# Altium PCB RFID PIC.PcbDoc
Units mm, origin at the board's own origin, x right, y up, seen from the top; angles counter-clockwise.
Board outline 126.98 x 89.15 mm, 2 copper layers (Top Layer, Bottom Layer); 27 components, 30 nets, 135 pads, 30 vias.
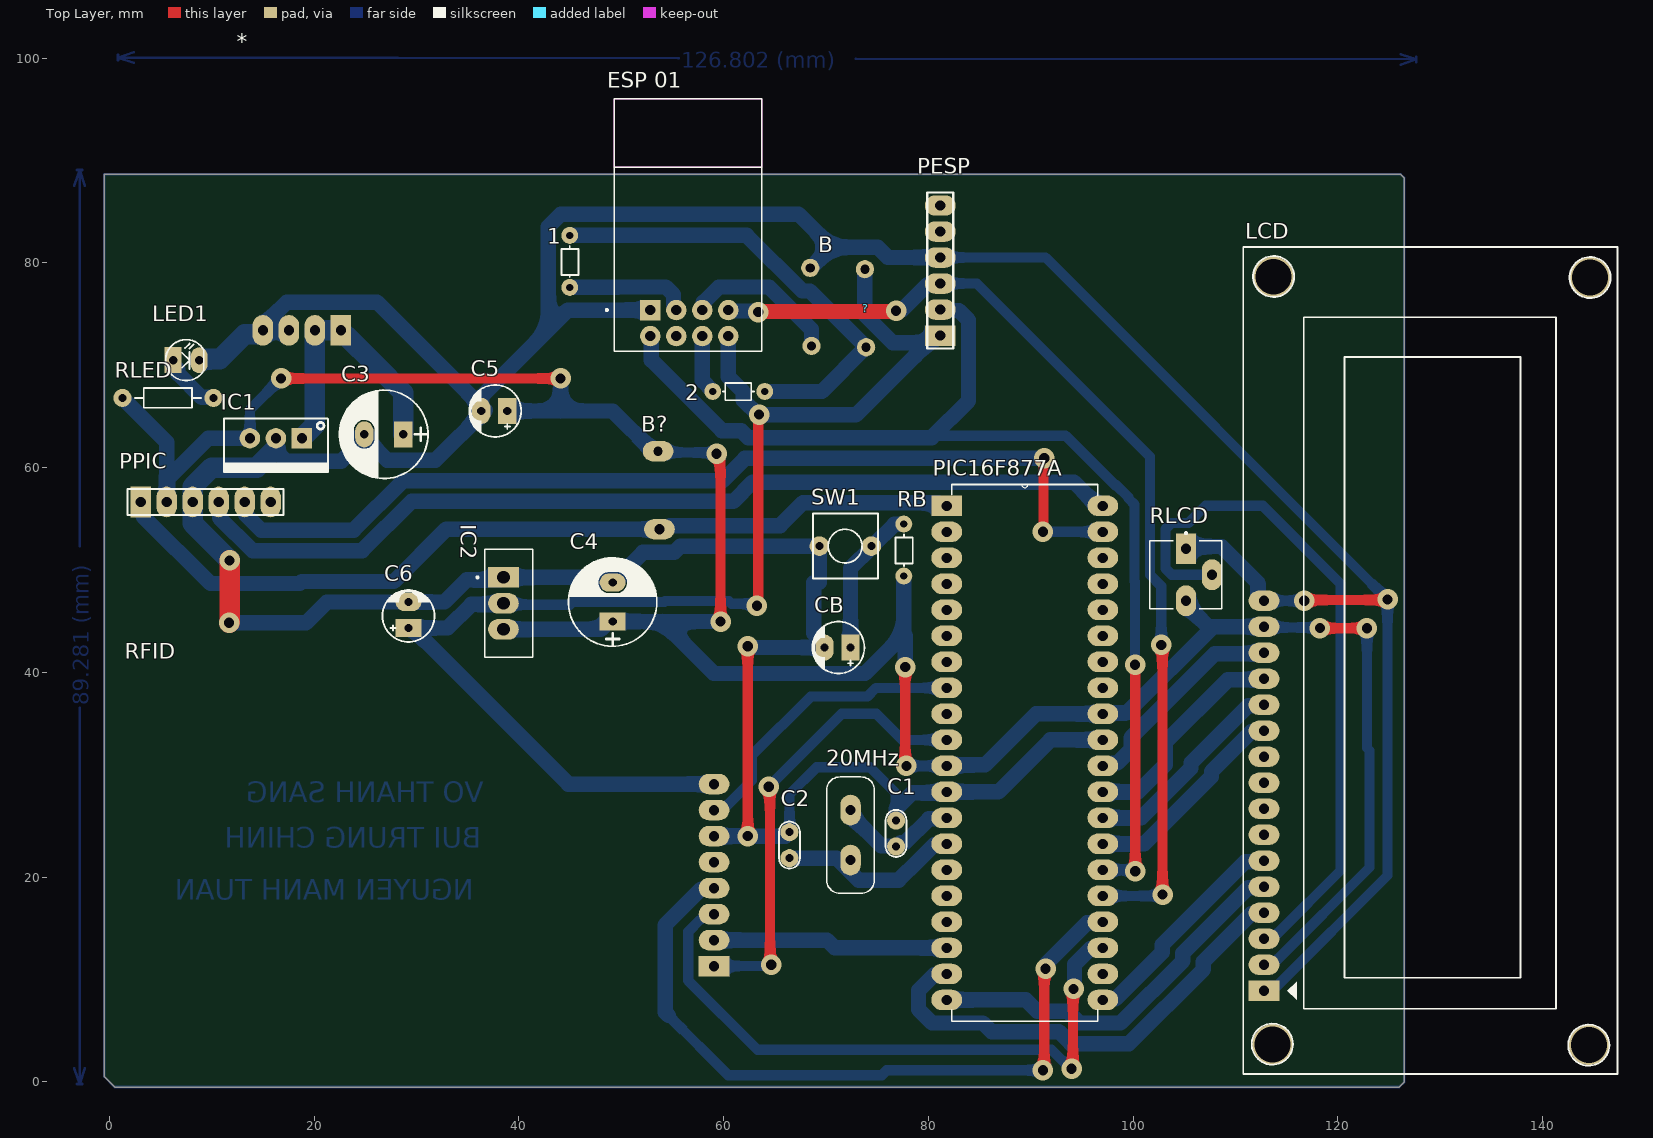
[diagram p0: Top Layer view]
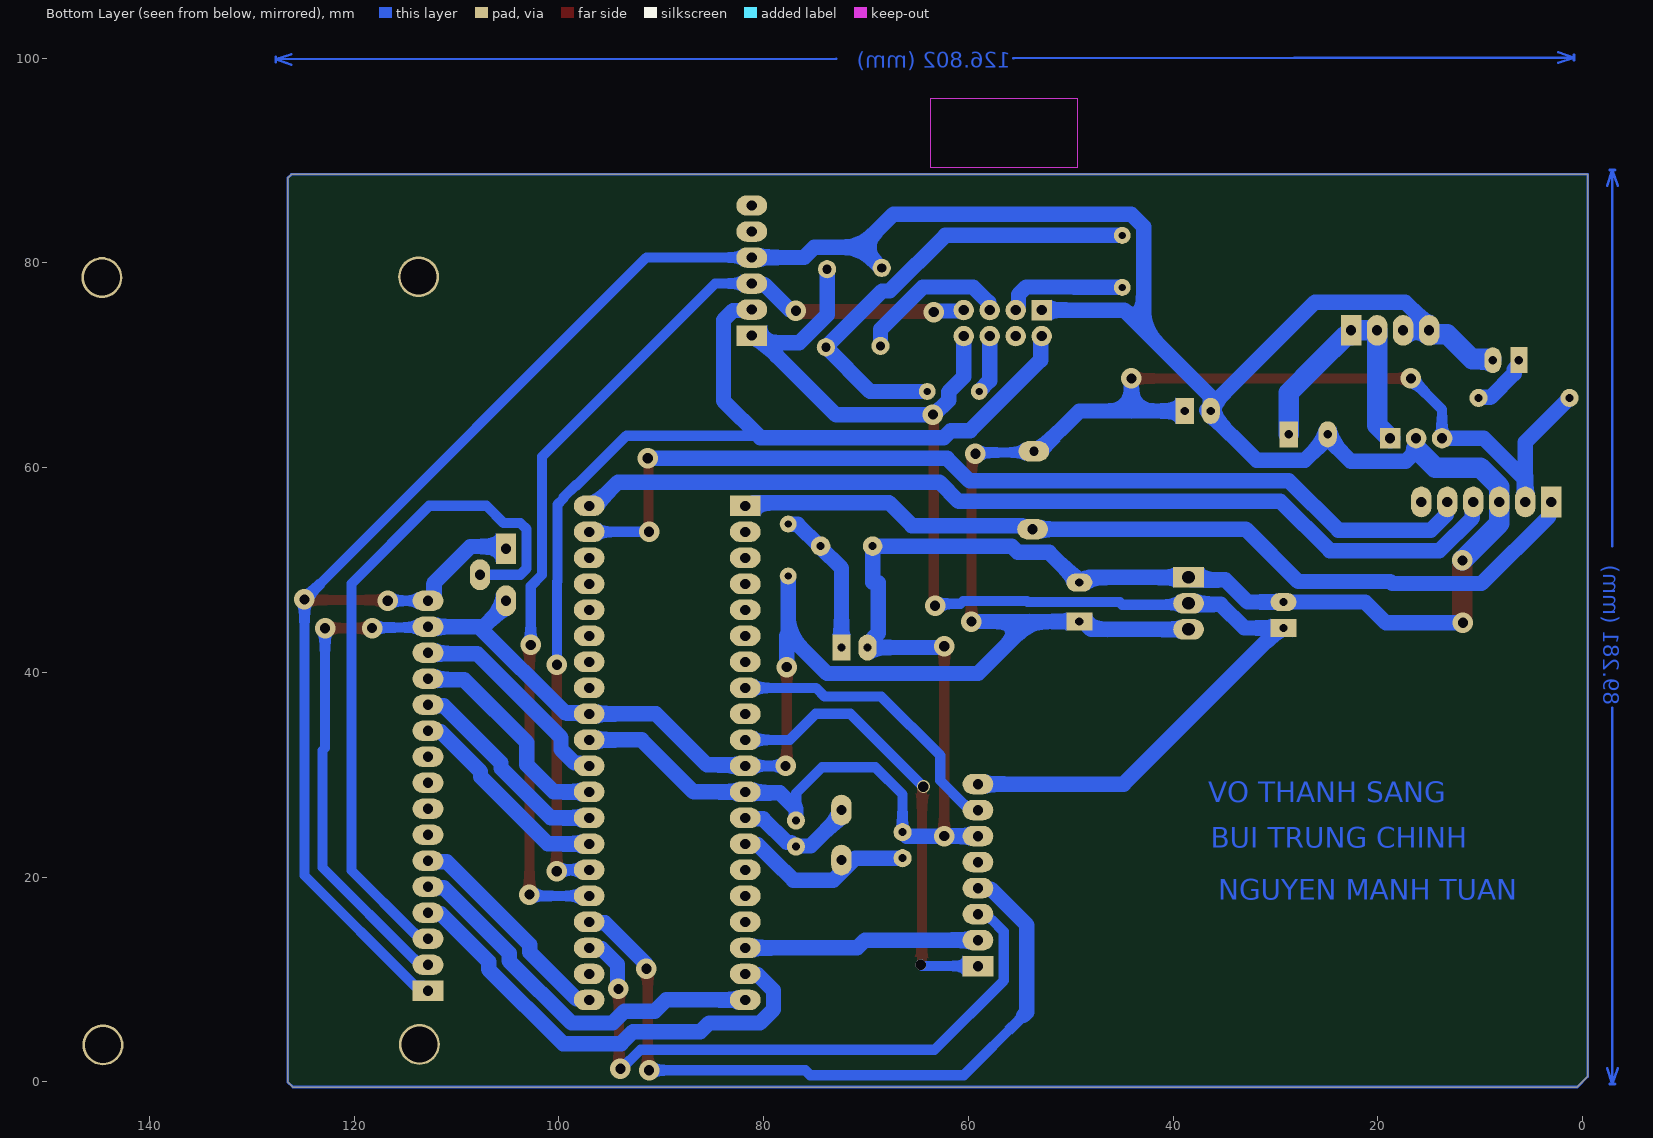
[diagram p1: Bottom Layer view, seen from below]
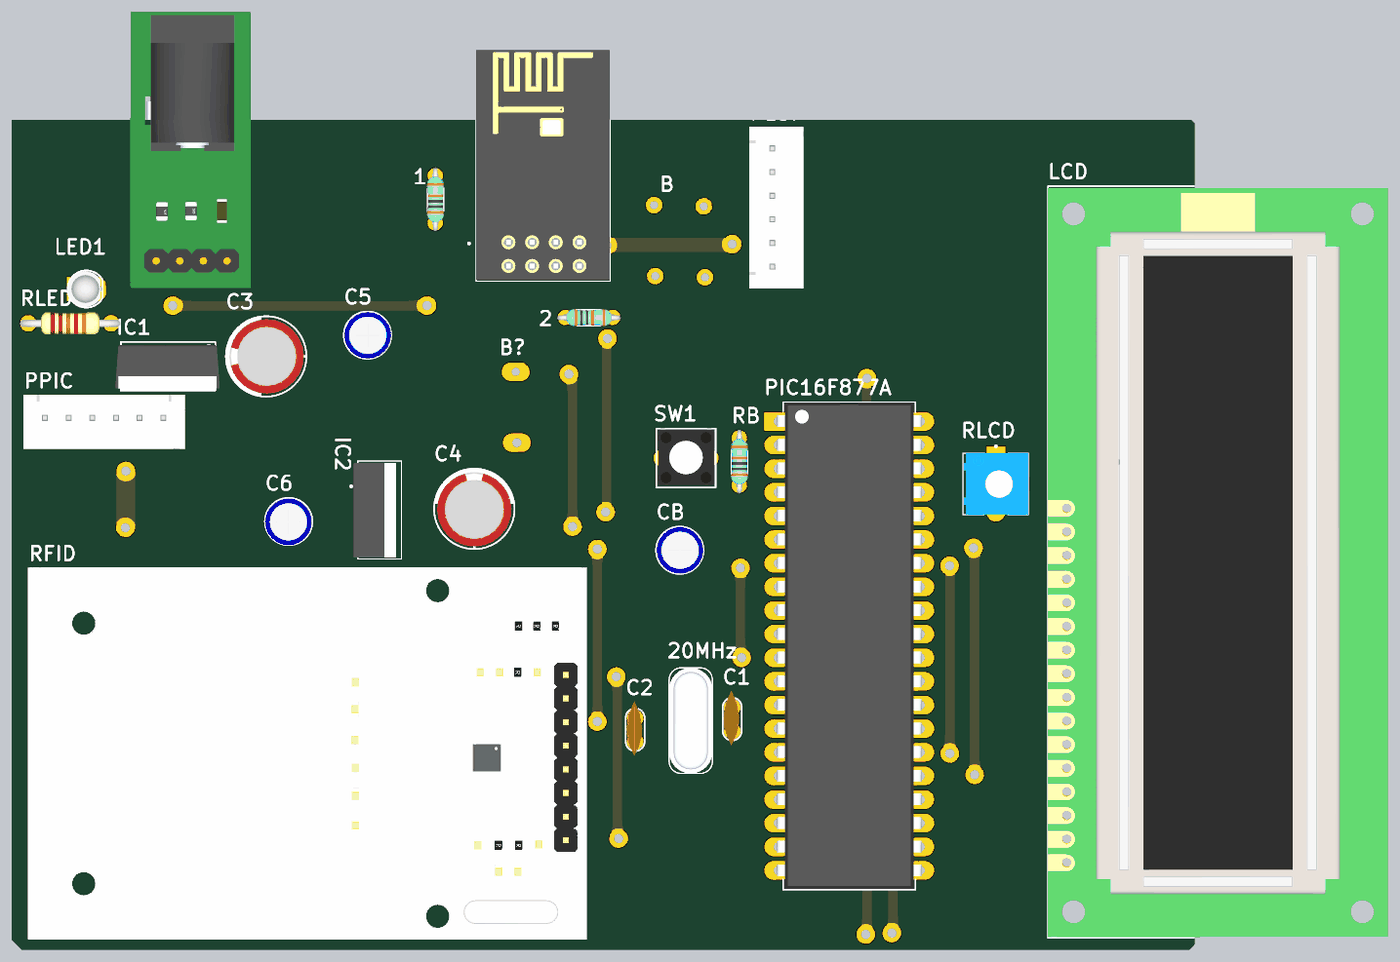
[diagram p2: 3D render of the assembled board from above, using the file's embedded part models]

## Layer stack, top to bottom
Top Solder: solder mask 0.0102, Solder Resist, Dk 3.5
Top Layer: signal copper 0.0356
Dielectric 1: dielectric 0.32, FR-4, Dk 4.8
Bottom Layer: signal copper 0.0356
Bottom Solder: solder mask 0.0102, Solder Resist, Dk 3.5

## Board outline
0.508,-0.508 -0.508,0.508 -0.508,88.646 126.111,88.646 126.476,88.281 126.476,-0.016 125.984,-0.508

## Design rules (kind name [scope] priority, off if disabled: settings)
Clearance [All] p1: gap=0.508 ignorepadtopadclearanceinfootprint=FALSE
PolygonConnect [All] p1: connectstyle=Relief reliefconductorwidth=0.254 reliefentries=4 polygonreliefangle="90 Angle" airgapwidth=0.254
RoutingVias [All] p1: holewidth=0.711 width=1.27 viastyle="Through Hole" minholewidth=0.711 minwidth=1.27 maxholewidth=0.711 maxwidth=1.27
SolderMaskExpansion [All] p1: expansion=0.102 istentingtop=FALSE
Width [All] p1: maxlimit=2 minlimit=1 preferedwidth=1.5 minimp=50.000000 maximp=50.000000 favimp=50.000000
30 further rules are at their usual default settings.

## Components (designator, comment, footprint, x,y, rotation, side; value= is the part's Value field where it differs from the comment)
1 "10k" R1/8W 44.958,80.137 r270 top value="R1/4W - 1K"
2 "10k" R1/8W 61.468,67.437 r180 top value="R1/4W - 1K"
20MHz "quartz" XTAL_ECS200S4X 72.39,24.103 r90 top
* "modul jack 5mm" ModulDC 22.606,73.406 r270 top
? "BUTTON BIT" PCBComponent_1#1 73.914,75.946 r0 top
B "BUTTON BIT" PCBComponent_1#1 68.58,76.073 r0 top
B? "BUTTON BIT" PCBComponent_1#2 53.594,57.404 r180 top
C1 "22pF" CN1 76.835,22.987 r90 top value=100pF
C2 "22pF" CN1 66.421,21.844 r90 top value=100pF
C3 "10uF/25V" CP1.5/3.4 28.702,63.246 r180 top value=100uF/35V/50V
C4 "1uF/10V" CP1.5/3.4 49.149,44.958 r90 top value=100uF/35V/50V
C5 "10uF" CP1/2 38.862,65.532 r180 top value=10uF/50V
C6 "10uF" CP1/2 29.21,44.323 r90 top value=10uF/50V
CB "10uF" CP1/2 72.39,42.418 r180 top value=10uF/50V
"ESP 01" "esp8266" XCVR_ESP8266-01/ESP-01 56.642,83.693 r0 top
IC1 "LM7805" QTO-220 18.796,62.865 r180 top
IC2 "LM1117" TO254P1054X470X1955-3 38.481,46.736 r270 top
LCD "LCD16x2A" LCD16X2 112.776,8.89 r90 top
LED1 "LED" LED-3 6.223,70.485 r0 top value="LED 3 ly Single Colour"
PESP "Header 6" HDR1X6 81.153,72.898 r90 top
PIC16F877A "16F877a" DIP254P1524X483-40 97.028,8.001 r0 top
PPIC "Header 6" HDR1X6 3.048,56.642 r0 top
RB "10k" R1/8W 77.597,51.943 r270 top value="R1/4W - 1K"
RFID "RC522" PCBComponent_1#3 59.055,11.303 r180 top
RLCD "10K" TRIM_3362P-1-203 105.156,49.53 r270 top value="R1/4W - 1K"
RLED "1k" R1/4W 10.16,66.802 r180 top value="R1/4W - 1K"
SW1 "SW" SW2 69.342,52.324 r0 top value="SW chip 2 pin"

## Footprints (in the part's own frame and the unit in brackets; to place one, negate y for a bottom-side part, rotate by r counter-clockwise, add the part's x,y. Pads: shape width x height; smd on the part's side, far side on the other; paste and mask are expansions set on the pad)
CN1 [mil]
  round 70 hole 31: 1(0,0) 2(100,0)
  silkscreen extent -40,-40 141,40, body extent -60,-30 170,37, height 265
CP1.5/3.4 [mil] "Tu hoa 220->470uF,16V, 470uF/16V,25V"
  rect 70x100 hole 32: 1(0,0)
  oval 70x100 hole 32: 2(150,0)
  silkscreen extent -95,-170 245,170, body extent -85,-157 230,157, height 446
CP1/2 [mil] "Tu hoa < 22uF/16>50V"
  rect 70x100 hole 32: 1(0,0)
  oval 70x100 hole 32: 2(100,0)
  silkscreen extent -53,-100 147,100, body extent -54,-99 144,100, height 296
DIP254P1524X483-40 [mm]
  rect 3x2 hole 0.991: 1(-15.24,48.26)
  oval 3x2 hole 0.991: 2(-15.24,45.72) 3(-15.24,43.18) 4(-15.24,40.64) 5(-15.24,38.1) 6(-15.24,35.56) 7(-15.24,33.02) 8(-15.24,30.48) 9(-15.24,27.94) 10(-15.24,25.4) 11(-15.24,22.86) 12(-15.24,20.32) 13(-15.24,17.78) 14(-15.24,15.24) 15(-15.24,12.7) 16(-15.24,10.16) 17(-15.24,7.62) 18(-15.24,5.08) 19(-15.24,2.54) 20(-15.24,0) 21(0,0) 22(0,2.54) 23(0,5.08) 24(0,7.62) 25(0,10.16) 26(0,12.7) 27(0,15.24) 28(0,17.78) 29(0,20.32) 30(0,22.86) 31(0,25.4) 32(0,27.94) 33(0,30.48) 34(0,33.02) 35(0,35.56) 36(0,38.1) 37(0,40.64) 38(0,43.18) 39(0,45.72) 40(0,48.26)
  silkscreen extent -14.73,-2.08 -0.51,50.34, body extent -15.39,-1.98 0.15,50.29, height 4.83
HDR1X6 [mm] "Connector; Header; 6 Position"
  rect 2x3 hole 1: 1(0,0)
  oval 2x3 hole 1: 2(2.54,0) 3(5.08,0) 4(7.62,0) 5(10.16,0) 6(12.7,0)
  silkscreen extent -1.27,-1.27 13.97,1.27, body extent -2.34,-3.35 15.04,2.49, height 7.21
LCD16X2 [mm] "LCD dipslay 16x2, 16 pin"
  rect 2x3 hole 1: 1(0,0)
  oval 2x3 hole 1: 2(2.54,0) 3(5.08,0) 4(7.62,0) 5(10.16,0) 6(12.7,0) 7(15.24,0) 8(17.78,0) 9(20.32,0) 10(22.86,0) 11(25.4,0) 12(27.94,0) 13(30.48,0) 14(33.02,0) 15(35.56,0) 16(38.1,0)
  round 4 hole 3.5: "Hole 0"(-5.283,-31.75) "Hole 0"(-5.232,-0.838) "Hole 0"(69.672,-31.852) "Hole 0"(69.748,-0.914)
  silkscreen extent -8.13,-34.54 72.64,2.03, body extent -8.08,-34.47 72.42,2.03, height 17.02
LED-3 [mil] "LED 2 PIN, 3ly Only colour"
  rect 65x100 hole 32: 1(0,0)
  oval 65x100 hole 32: 2(100,0)
  silkscreen extent -29,-78 118,79, body extent -29,-75 109,75, height 256
ModulDC [mm]
  rect 3x2 hole 1: 1(0,0)
  oval 3x2 hole 1: 1(0,-2.54) 2(0,-5.08) 2(0,-7.62)
  body extent -26.91,-10.41 2.78,2.54, height 11
PCBComponent_1#1 [mil]
  round 70 hole 35: 1(-5,135) 2(0,-165)
  body extent -80,-210 74,180, height 323
PCBComponent_1#2 [mil]
  oval 118.11x78.74 hole 39.37: 1(-5,135)
  oval 118.11x78.74 hole 35: 2(0,-165)
  body extent -80,-210 74,180, height 323
PCBComponent_1#3 [mil]
  rect 118.11x78.74 hole 40: 1(0,0)
  oval 118.11x78.74 hole 40: 2(0,-100) 3(0,-200) 4(0,-300) 5(0,-400) 6(0,-500) 7(0,-600) 8(0,-700)
  body extent -85,-1152 2277,422, height 588
QTO-220 [mm] "TO-220 - 1-2-3"
  rect 2x2 hole 0.991: 1(0,0)
  round 2 hole 0.991: 2(2.54,0) 3(5.08,0)
  silkscreen extent -2.54,-1.93 7.62,3.3, body extent -3.02,-1.63 8.19,3.06, height 22.98
R1/4W [mil] "R 1/4W, 2 Pin, 350mil"
  round 70 hole 31: 1(0,0) 2(350,0)
  silkscreen extent 48,-38 302,38, body extent -40,-47 386,47, height 111
R1/8W [mil] "R 1/8W, 2 pin, 300mil"
  round 65 hole 28: 1(-100,0) 2(100,0)
  silkscreen extent -60,-32 61,34, body extent -135,-35 135,37, height 86
SW2 [mil] "SW button 2pin, 250x 250 mil"
  round 75 hole 31: 1(0,0) 2(200,0)
  silkscreen extent -25,-125 225,125, body extent -18,-116 218,128, height 197
TO254P1054X470X1955-3 [mm]
  rect 2x3 hole 1.24: 1(-2.54,0)
  oval 2x3 hole 1.24: 2(0,0) 3(2.54,0)
  silkscreen extent -5.27,-2.64 5.27,2.86, body extent -5.08,-2.29 5.08,2.29, height 19.55
TRIM_3362P-1-203 [mm]
  rect 3x2 hole 1: 1(-2.54,0)
  oval 3x2 hole 1: 2(0,2.54) 3(2.54,0)
  silkscreen extent -4.16,-3.53 3.3,3.47, body extent -3.3,-3.49 3.3,3.49, height 4.88
XCVR_ESP8266-01/ESP-01 [mm]
  rect 2x2 hole 1: 1(-3.81,-8.31)
  round 2 hole 1: 2(-1.27,-8.31) 3(1.27,-8.31) 4(3.81,-8.31) 5(-3.81,-10.85) 6(-1.27,-10.85) 7(1.27,-10.85) 8(3.81,-10.85)
  Keep-Out Layer region: 7.09,5.65 -7.31,5.65 -7.31,12.35 7.09,12.35
  silkscreen extent -8.16,-12.35 7.09,12.35, body extent -7.33,-12.22 7.07,12.48, height 6.5
XTAL_ECS200S4X [mm]
  oval 3x2 hole 1: 1(-2.44,0) 2(2.44,0)
  silkscreen extent -5.68,-2.33 5.68,2.33, body extent -5.68,-2.32 5.68,2.32, height 3.5

## Part data
1 2 RB RLCD: library part RES, "Resistor 1/4W"
? B B?: library part DIP
C1 C2: library part CAP, "Cap np  1pF - 472pF"
C3 C4: library part CP3, "Cap 100uF/35V - 470uF/16V", Description 1="1000uF/6,3V - 470uF/16V - 330uF - 25V", Description 2="220uF/35V - 100uF/50V - 63V - 4,7uF/200V", Description 3="22uF => 33uF100V - 3,3uF => 4,7uF/250V", Description 4="2,2uF =>3,3uF/350 - 2,2uF/400V - 1uF/450V"
C5 C6 CB: library part CP0, "Cap P  0,1uF < 22uF , 16 - 50V", Description 1="10 => 220uF/6,3V/10V - 10uF => 100uF/16V", Description 2="0,1uF => 33uF/50V - 10uF => 22uF/63V", Description 3="0,47uF => 10uF/100V"
IC1: library part LM78xx, "On ap +, from + 5 to + 24VDC"
IC2: library part asm1117
LCD: library part LCD16x2, "LCD dipslay 16 char, 2 line"
LED1: "LED Single colour Green and Red"
PESP PPIC: "Header, 6-Pin", LatestRevisionDate=17-Jul-2002, LatestRevisionNote="Re-released for DXP Platform.", Publisher="Altium Limited"
RLED: library part R, "Resistor 1/4W"
SW1: library part SW2, "Switch button 2 pin"

## Via types
v1: diameter 2, hole 1, Top Layer to Bottom Layer, 20 vias
v2: diameter 2/2 (per signal layer), hole 1, Top Layer to Bottom Layer, 8 vias
v3: diameter 2/1.27 (per signal layer), hole 1, Top Layer to Bottom Layer, 1 vias
v4: diameter 2/1 (per signal layer), hole 1, Top Layer to Bottom Layer, 1 vias

## Nets (pads, with @x,y where several pads share a name; then routed paths per layer and width w, separated by ;. In a path a pad name is that pad's centre, name@x,y a point inside that pad or via, vN(x,y) a via of type N, cw(c..) or ccw(c..) an arc to the next point about the centre after c; other vN are vias at no path point)
2: B?.2 C4.1 C5.1 IC1.3 IC2.3 LCD.2 LCD.15 PIC16F877A.11 PIC16F877A.32 PPIC.2 RB.2 RLCD.3 RLED.2 | length 260
  Top Layer w1: v1(16.764,68.707) v1(44.069,68.707) ; v1(59.305,61.345) 59.305,61.074 59.69,60.689 v1(59.69,44.958) ; v1(77.724,40.513) 77.724,31.061 77.851,30.934 v1(77.851,30.861) ; v1(118.237,44.323) 118.246,44.314 122.824,44.314 v1(122.833,44.304)
  Bottom Layer w1: IC1.3 13.716,65.659 v1(16.764,68.707) ; B?.2 53.719,61.47 59.18,61.47 v1(59.305,61.345) ; v1(77.851,30.861) PIC16F877A.11 ; LCD.2 113.547,11.43 114.079,11.962 114.108,11.962 123.082,20.936 123.082,32.36 122.833,32.609 v1(122.833,44.304) ; LCD.15 112.84,44.386 118.173,44.386 v1(118.237,44.323)
  Bottom Layer w1.5: RLED.2 5.588,62.484 PPIC.2 5.684,56.738 5.684,58.898 9.651,62.865 IC1.3 ; IC2.3 48.006,44.196 48.768,44.958 C4.1 53.975,44.958 ; C5.1 44.069,65.532 ; v1(44.069,68.707) 44.069,65.532 ; B?.2 53.094,61.595 49.157,65.532 44.069,65.532 ; v1(59.69,44.958) 53.975,44.958 ; RB.2 77.597,43.687 ; v1(77.724,40.513) 77.724,43.56 77.597,43.687 ; PIC16F877A.11 81.884,30.957 85.519,30.957 90.503,35.941 PIC16F877A.32 97.124,36.037 99.364,36.037 107.777,44.45 ; RLCD.3 105.156,46.625 107.331,44.45 107.777,44.45 ; LCD.15 107.777,44.45 ; 53.975,44.958 59.043,39.89 73.8,39.89 77.597,43.687
3: "ESP 01.1" *.2 B.1 C1.2 C2.2 C3.2 C4.2 C5.2 C6.2 CB.2 IC1.2 IC2.1 LCD.1 LCD.16 LED1.2 PESP.4 PIC16F877A.12 PIC16F877A.31 PPIC.3 RFID.6 RLCD.1 SW1.1 | length 433.1
  Top Layer w1: v1(62.357,24.003) v1(62.357,42.545) ; v1(116.713,46.99) 116.776,47.053 124.777,47.053 v1(124.841,47.117)
  Top Layer w2: v2(11.684,44.831) 11.737,44.884 v2(11.737,50.927)
  Bottom Layer w1: C2.2 66.421,28.067 69.088,30.734 74.295,30.734 76.835,28.194 76.835,26.67 ; PESP.4 91.44,80.518 v1(124.841,47.117) 124.841,20.155 114.076,9.39 113.276,9.39 LCD.1 ; LCD.16 v1(116.713,46.99) 116.84,46.99 v1@116.967,46.863
  Bottom Layer w1.5: v2(11.684,44.831) 19.203,44.831 21.235,46.863 C6.2 32.73,46.863 34.893,49.026 38.231,49.026 IC2.1 48.185,49.276 C4.2@48.693,48.768 ; 16.256,61.858 16.538,61.576 16.538,61.344 17.275,60.607 22.634,60.607 24.892,62.865 C3.2@24.892,62.94 ; *.2@17.526,73.406 14.986,73.406 14.986,73.826 17.324,76.164 26.136,76.164 C5.2@36.375,65.925 ; C3.2 C3.2@24.892,62.94 ; C4.2 49.455,48.768 49.583,48.896 49.583,49.202 52.098,51.717 55.156,51.717 55.763,52.324 SW1.1 69.342,48.768 ; 52.832,75.383 44.775,75.383 42.874,73.483 ; RFID.6 v1(62.357,24.003) 66.04,24.003 C2.2 ; v1(62.357,42.545) 62.484,42.418 CB.2 69.85,42.773 68.806,43.817 68.806,48.768 ; B.1 68.528,79.502 70.548,81.522 ; C1.2 76.835,26.67 78.39,28.225 81.692,28.225 PIC16F877A.12 86.82,28.321 91.9,33.401 PIC16F877A.31 ; PESP.4 76.035,80.518 75.031,81.522 70.548,81.522 ; RLCD.1 105.374,52.288 108.631,52.288 112.18,48.739 112.18,47.221 112.411,46.99 LCD.16 ; C3.2@24.892,62.94 27.114,60.718 31.848,60.718 36.715,65.585 C5.2@36.375,65.925 ; C5.2@36.375,65.925 36.375,66.983 42.874,73.483 ; 42.874,73.483 42.874,83.54 44.095,84.761 67.31,84.761 70.548,81.522
  Bottom Layer w2: LED1.2@8.938,70.583 10.766,70.583 13.209,73.026 14.986,73.026 *.2@14.986,73.406 ; v2(11.737,50.927) 8.128,54.536 PPIC.3 8.128,58.149 9.983,60.003 14.401,60.003 16.256,61.858
3V3: "ESP 01.8" ?.1 C6.1 IC2.2 PESP.1 RFID.8 | length 131
  Top Layer w1: v1(63.246,46.51) 63.373,46.637 63.373,65.095 v1(63.449,65.171)
  Bottom Layer w1: IC2.2 38.608,46.609 44.953,46.609 45.215,46.871 54.204,46.871 54.299,46.966 60.522,46.966 60.786,46.701 63.055,46.701 v1(63.246,46.51)
  Bottom Layer w1.5: C6.1 C6.1@29.591,44.323 ; IC2.2 38.385,46.64 35.347,46.64 33.03,44.323 C6.1@29.591,44.323 ; RFID.8 44.831,29.083 C6.1@29.591,44.323 ; 60.452,72.843 60.452,68.86 61.924,67.387 61.924,66.574 63.327,65.171 v1(63.449,65.171) ; v1@63.5,65.151 72.906,65.151 PESP.1@79.932,72.177 ; ?.1 73.787,74.918 76.528,72.177 PESP.1@79.932,72.177 ; PESP.1@80.653,72.898 PESP.1@79.932,72.177
4: LCD.11 PIC16F877A.27 | length 20.6
  Bottom Layer w1.5: PIC16F877A.27 101.078,23.241 107.651,29.815 107.651,30.319 111.527,34.194 112.68,34.194 LCD.11
5: LCD.12 PIC16F877A.28 | length 20.6
  Bottom Layer w1.5: PIC16F877A.28 100.778,25.781 105.643,30.646 105.643,31.151 111.227,36.734 112.68,36.734 LCD.12
6: LCD.13 PIC16F877A.29 | length 21.6
  Bottom Layer w1.5: PIC16F877A.29 100.478,28.321 103.124,30.967 103.124,33.147 109.251,39.274 112.68,39.274 LCD.13
7: LCD.14 PIC16F877A.30 | length 21
  Bottom Layer w1.5: PIC16F877A.30 97.663,30.861 97.945,31.143 98.463,31.143 99.786,32.466 99.786,33.619 107.981,41.814 112.68,41.814 LCD.14
Net1_1: 1.1 2.1 ?.2 | length 45.2
  Bottom Layer w1.5: 1.1 62.242,82.677 67.676,77.243 68.426,77.243 ?.2 69.596,67.437 2.1
Net1_2: 1.2 "ESP 01.2" | length 12.1
  Bottom Layer w1.5: 1.2 49.654,77.597 49.698,77.641 54.353,77.641 55.09,76.904 55.09,75.8 55.372,75.518 55.372,75.383
Net2_2: 2.2 "ESP 01.7" | length 5.8
  Bottom Layer w1.5: 57.912,72.843 57.912,68.494 58.928,67.478 2.2
Net20MHz_1: 20MHz.1 C2.1 PIC16F877A.14 | length 17.7
  Bottom Layer w1.5: C2.1 71.037,21.844 72.054,20.827 73.184,19.697 77.091,19.697 79.03,21.636 80.539,23.145 81.692,23.145 PIC16F877A.14
Net20MHz_2: 20MHz.2 C1.1 PIC16F877A.13 | length 12.3
  Bottom Layer w1.5: 20MHz.2 72.39,26.043 75.393,23.04 76.782,23.04 C1.1 76.91,22.987 77.303,23.38 77.724,23.38 80.03,25.685 81.692,25.685 PIC16F877A.13
Net*_1: *.1 C3.1 IC1.1 | length 26.6
  Bottom Layer w2: IC1.1 20.066,64.135 20.066,73.406 22.606,73.406 22.606,72.906 23.106,72.906 25.934,70.078 28.702,67.31 C3.1
NetB?_1: B?.1 PIC16F877A.1 PPIC.1 | length 86.1
  Bottom Layer w1.5: PPIC.1 3.298,56.392 3.298,55.239 9.868,48.669 18.595,48.669 18.797,48.871 27.779,48.871 32.883,53.975 54.356,53.975 54.713,54.332 65.517,54.332 67.752,56.567 80.982,56.567 81.288,56.261 PIC16F877A.1
NetB_2: "ESP 01.3" B.2 | length 15.3
  Bottom Layer w1.5: 57.912,75.383 58.008,75.479 58.008,76.132 59.517,77.641 64.438,77.641 68.58,73.499 B.2
NetCB_1: CB.1 RB.1 SW1.2 | length 14.8
  Bottom Layer w1.5: CB.1 72.39,50.182 74.422,52.214 SW1.2 74.532,52.324 76.662,54.454 77.568,54.454 RB.1
"NetESP 01_4": "ESP 01.4" PESP.3 PIC16F877A.25 | length 98.6
  Top Layer w1: v1(102.743,42.672) 102.87,42.545 v1(102.87,18.288)
  Top Layer w1.5: v2(63.373,75.184) 63.436,75.248 76.772,75.248 v2(76.835,75.311)
  Bottom Layer w1: PESP.3 84.709,77.978 101.64,61.047 101.64,49.528 102.743,48.425 v1(102.743,42.672) ; PIC16F877A.25 102.67,18.161 102.797,18.288 v1(102.87,18.288)
  Bottom Layer w1.5: 60.452,75.383 60.548,75.287 63.134,75.287 63.238,75.184 v2(63.373,75.184) ; v2(76.835,75.311) 76.931,75.407 77.428,75.407 79.904,77.882 81.057,77.882 PESP.3
"NetESP 01_5": "ESP 01.5" PESP.2 PIC16F877A.26 | length 110.6
  Top Layer w1: v1(100.184,40.748) 100.203,40.729 v1(100.203,20.574)
  Bottom Layer w1: 80.518,63.119 93.399,63.119 98.249,58.269 98.36,58.269 99.536,57.093 99.536,56.982 100.132,56.386 100.132,48.903 100.184,48.851 v1(100.184,40.748) ; PIC16F877A.26 100.003,20.701 100.13,20.574 v1(100.203,20.574)
  Bottom Layer w1.5: 52.832,72.843 52.928,72.747 52.928,70.491 59.819,63.599 61.706,63.599 62.392,62.913 80.312,62.913 83.911,66.512 83.911,74.419 82.988,75.342 81.249,75.342 PESP.2
NetLCD_3: LCD.3 RLCD.2 | length 68.1
  Bottom Layer w1: RLCD.2 103.77,49.53 103.148,50.152 103.148,53.988 103.738,54.578 105.376,54.578 107.059,56.261 112.649,56.261 120.245,48.665 120.245,20.639 114.108,14.502 114.079,14.502 113.547,13.97 LCD.3
NetLED1_1: LED1.1 RLED.1 | length 6
  Bottom Layer w1.5: LED1.1 6.223,70.04 6.679,69.584 6.679,69.177 9.002,66.855 10.107,66.855 RLED.1
NetPIC16F877A_39: PIC16F877A.39 PPIC.5 | length 95.9
  Top Layer w1: v1(91.186,53.721) 91.249,53.785 91.249,60.842 v1(91.313,60.905)
  Bottom Layer w1: v1(91.186,53.721) PIC16F877A.39
  Bottom Layer w1.5: PPIC.5 13.304,56.546 13.304,55.393 14.813,53.884 23.857,53.884 28.683,58.71 59.863,58.71 62.059,60.905 v1(91.313,60.905)
NetPIC16F877A_40: PIC16F877A.40 PPIC.4 | length 92.9
  Bottom Layer w1.5: PPIC.4 10.764,56.546 10.764,55.093 13.981,51.876 24.689,51.876 29.515,56.702 60.944,56.702 62.817,58.575 94.215,58.575 96.528,56.261 PIC16F877A.40
PD0: LCD.4 PIC16F877A.19 | length 46.1
  Bottom Layer w1.5: PIC16F877A.19 81.692,10.445 80.539,10.445 79.03,8.936 79.03,7.066 80.353,5.743 85.316,5.743 86.166,4.893 92.746,4.893 93.904,3.735 99.595,3.735 106.853,10.994 106.853,11.741 111.527,16.414 112.68,16.414 LCD.4
PD1: LCD.5 PIC16F877A.20 | length 37.9
  Bottom Layer w1.5: PIC16F877A.20 89.512,8.001 90.612,6.901 93.578,6.901 94.736,5.743 98.763,5.743 104.845,11.825 104.845,12.572 111.227,18.954 112.68,18.954 LCD.5
PD2: LCD.6 PIC16F877A.21 | length 21.8
  Bottom Layer w1.5: PIC16F877A.21 97.124,8.097 98.277,8.097 102.837,12.657 102.837,13.404 110.928,21.494 112.68,21.494 LCD.6
RST: PIC16F877A.8 RFID.7 | length 29.1
  Bottom Layer w1: RFID.7 59.826,26.543 60.358,27.075 60.387,27.075 62.746,29.434 62.746,31.885 68.493,37.632 74.028,37.632 74.877,38.481 PIC16F877A.8
SCK: PIC16F877A.18 RFID.2 | length 23
  Bottom Layer w1.5: RFID.2 70.088,13.843 70.85,13.081 PIC16F877A.18
SDA: PIC16F877A.10 RFID.1 | length 44.6
  Top Layer w1: v3(64.389,28.829) 64.516,28.702 64.516,11.557 v4(64.643,11.43)
  Bottom Layer w1: RFID.1 64.516,11.303 v4(64.643,11.43) ; v3(64.389,28.829) 71.519,35.959 74.894,35.959 77.451,33.401 PIC16F877A.10
SI: PIC16F877A.23 RFID.3 | length 62.8
  Top Layer w1: v2(93.98,1.27) 94.107,1.397 94.107,9.013 v2(94.173,9.079)
  Bottom Layer w1: RFID.3 58.284,16.383 57.752,15.851 57.723,15.851 56.547,14.675 56.547,9.885 63.297,3.135 92.018,3.135 93.883,1.27 v2(93.98,1.27)
  Bottom Layer w1.5: v2(94.173,9.079) 94.269,9.175 94.269,11.475 95.779,12.985 96.932,12.985 PIC16F877A.23
SO: PIC16F877A.24 RFID.4 | length 72.2
  Top Layer w1: v2(91.186,1.127) 91.313,1.254 91.313,10.922 v2(91.44,11.049)
  Bottom Layer w1: 54.61,6.477 60.452,0.635 75.438,0.635 75.93,1.127 v2(91.186,1.127)
  Bottom Layer w1.5: 54.61,6.477 54.289,6.798 54.289,15.31 57.806,18.827 58.959,18.827 RFID.4 ; v2(91.44,11.049) 91.536,11.145 91.536,11.582 95.479,15.525 96.932,15.525 PIC16F877A.24
pads on no net: "ESP 01.6" "LCD.Hole 0" LCD.7 LCD.8 LCD.9 LCD.10 PESP.5 PESP.6 PIC16F877A.2 PIC16F877A.3 PIC16F877A.4 PIC16F877A.5 PIC16F877A.6 PIC16F877A.7 PIC16F877A.9 PIC16F877A.15 PIC16F877A.16 PIC16F877A.17 PIC16F877A.22 PIC16F877A.33 PIC16F877A.34 PIC16F877A.35 PIC16F877A.36 PIC16F877A.37 PIC16F877A.38 PPIC.6 RFID.5
copper on no net: | length 629
  Bottom Layer w0.254: -3.429,1.311 -2.921,-0.213 ; -3.429,87.544 -2.921,89.068 ; -3.175,-0.213 -2.667,-0.213 ; -3.175,89.068 -2.667,89.068 ; -2.921,36.53 -2.921,-0.213 ; -2.921,52.324 -2.921,89.068 ; -2.413,1.311 -2.921,-0.213 ; -2.413,87.544 -2.921,89.068 ; 0.838,99.799 0.839,100.307 ; 2.362,99.543 0.839,100.053 ; 2.363,100.559 0.839,100.053 ; 55.581,99.974 0.839,100.053 ; 72.898,99.949 127.64,99.87 ; 126.115,99.364 127.64,99.87 ; 126.117,100.38 127.64,99.87 ; 127.64,99.616 127.64,100.124 ; -0.508,0.508 -0.508,88.646 126.111,88.646 126.476,88.281 126.476,-0.016 125.984,-0.508 0.508,-0.508 -0.508,0.508

## Other copper
Bottom Layer:
  text "126.802 (mm)" at 55.833,99.059 h1.52 r359.92
  text "89.281 (mm)" at -2.007,36.784 h1.52 r90
  text "VO THANH SANG" at 36.584,27.297 h2
  text "BUI TRUNG CHINH" at 36.33,22.852 h2
  text "NGUYEN MANH TUAN" at 35.568,17.772 h2